# Altium PCB 排针顺序参考.PcbDoc
Units mm, origin at the board's own origin, x right, y up, seen from the top; angles counter-clockwise.
Board outline 152.4 x 101.6 mm, 2 copper layers (Top Layer, Bottom Layer); 12 components, 66 nets, 194 pads, 0 vias.
Unrouted connection lines stored in the file: 117.
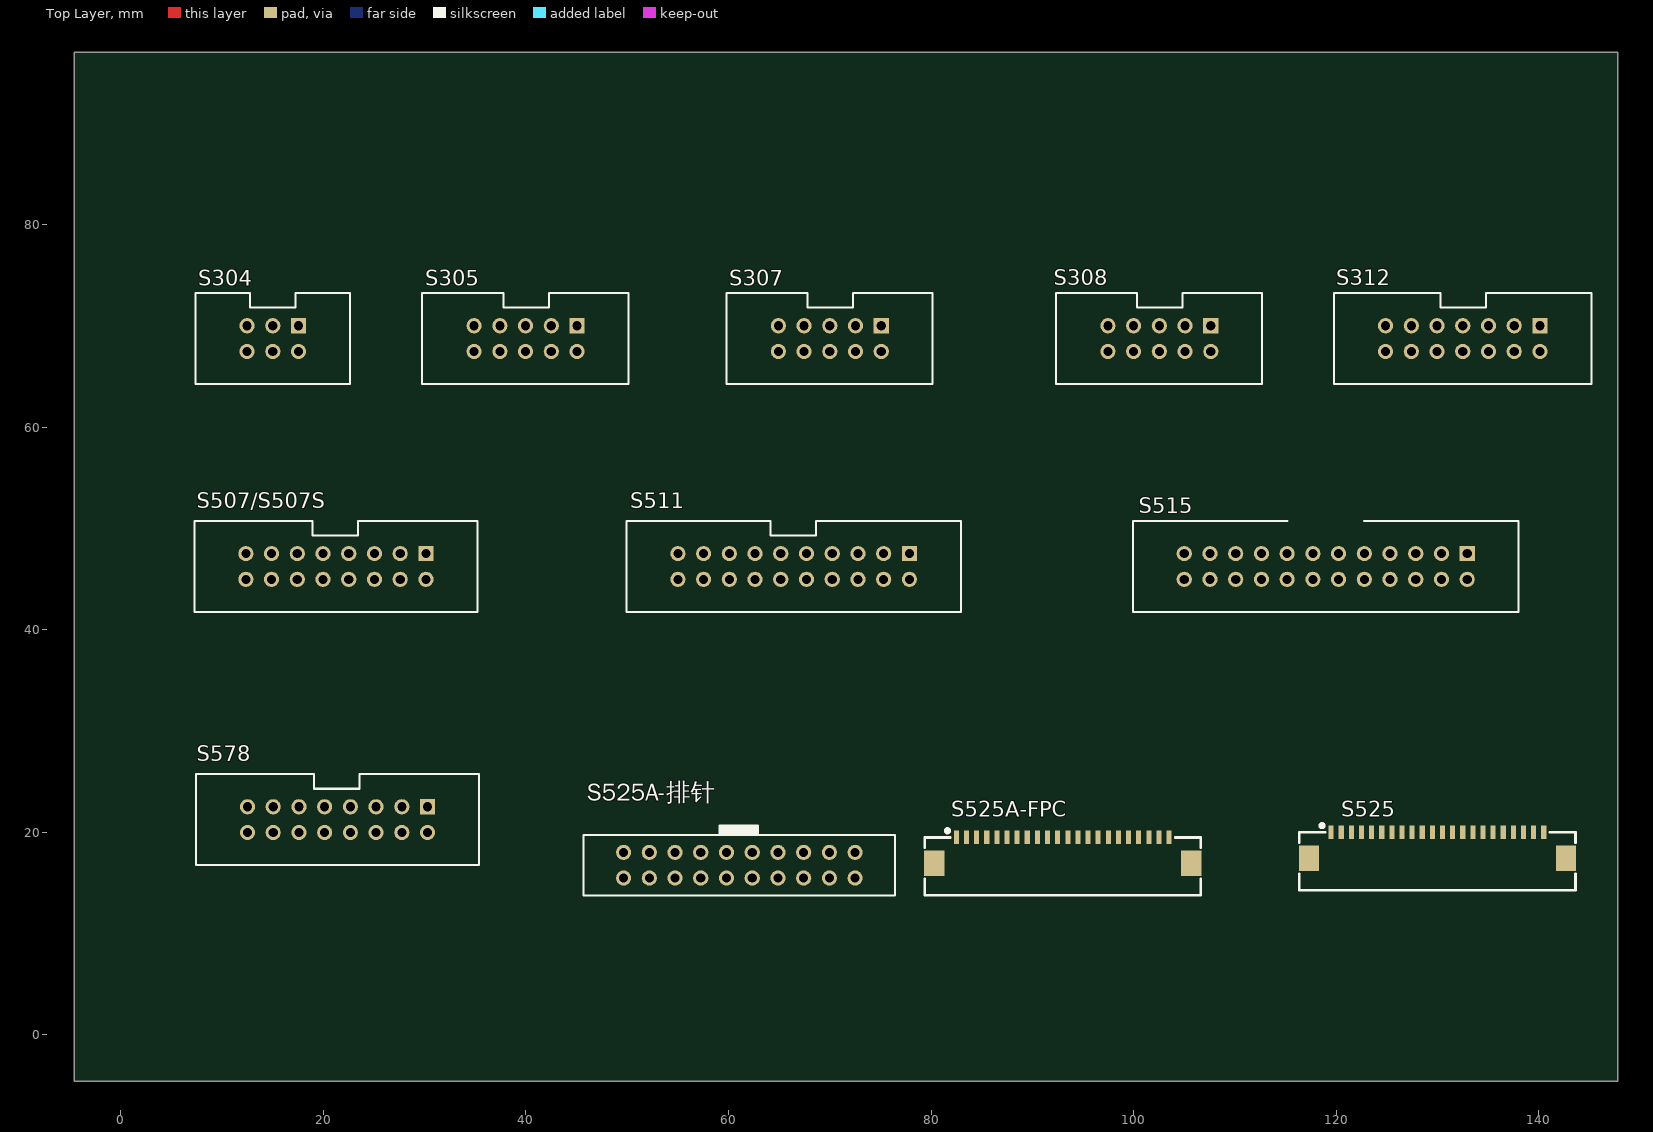
[diagram p0: Top Layer view]
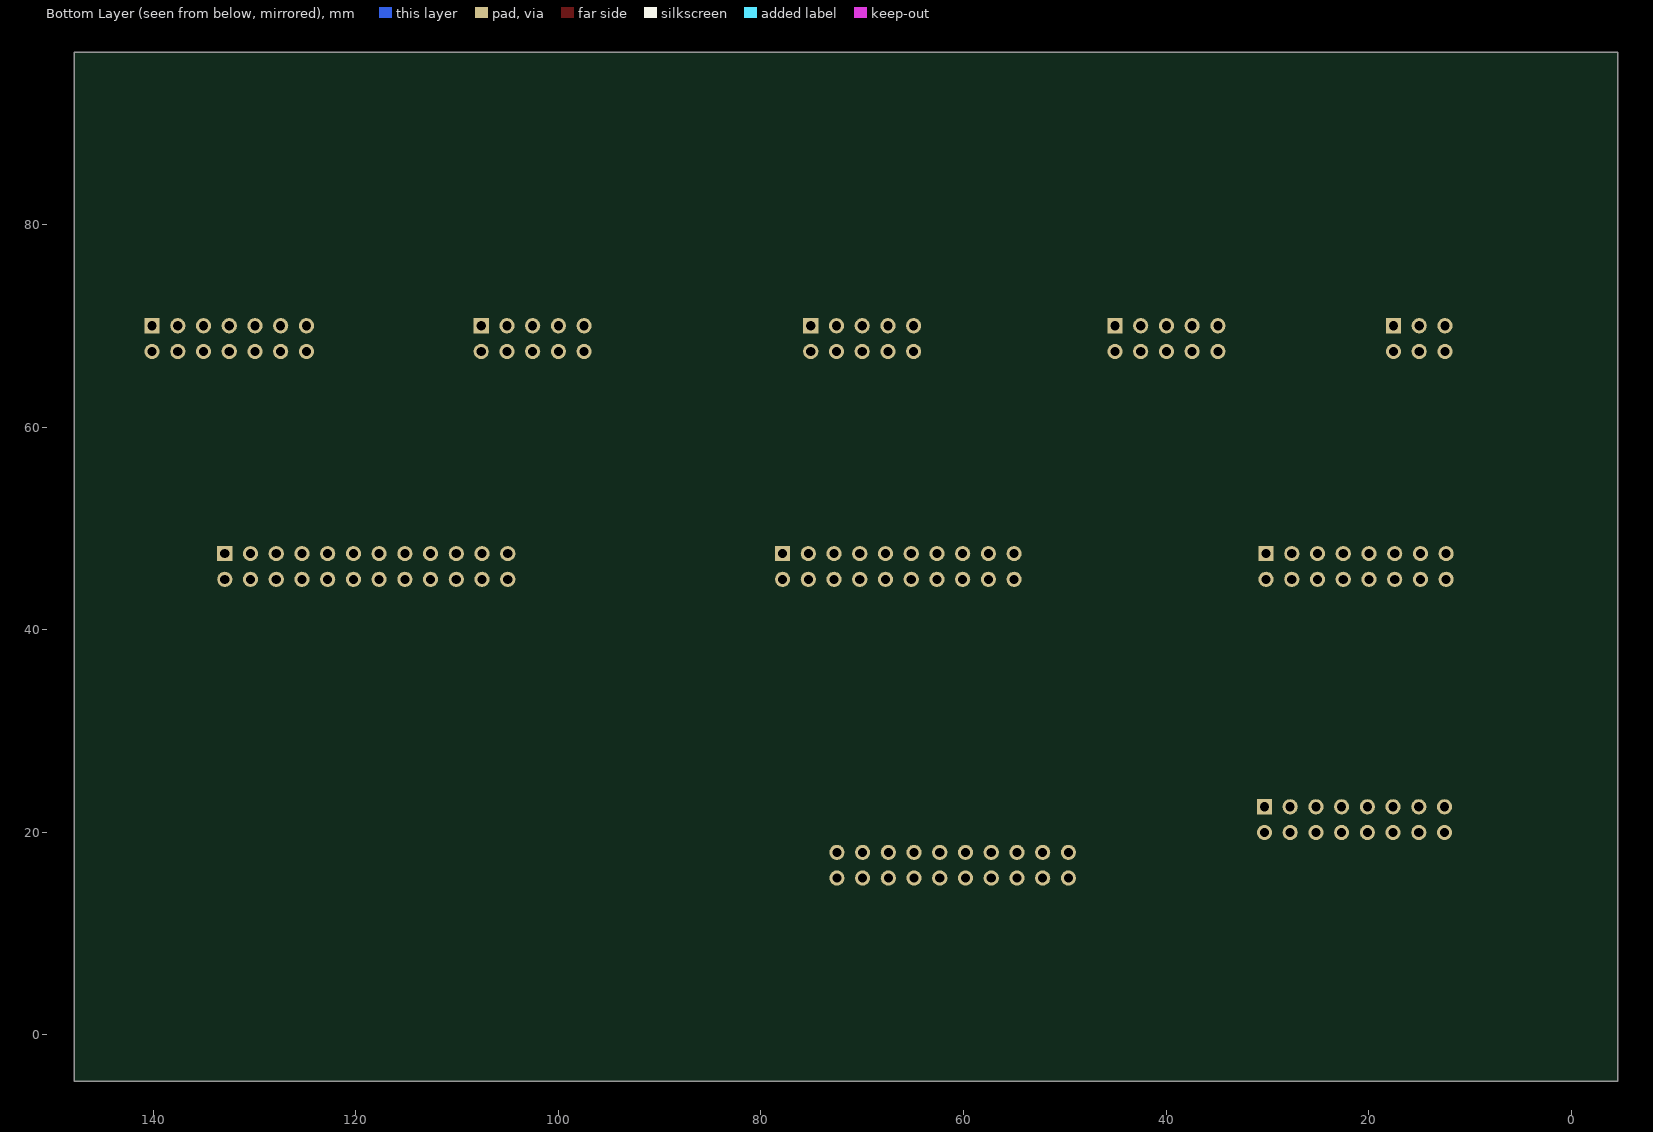
[diagram p1: Bottom Layer view, seen from below]

## Layer stack, top to bottom
Top Solder: solder mask 0.0102, Solder Resist, Dk 3.5
Top Layer: signal copper 0.0356
Dielectric 1: dielectric 0.32, FR-4, Dk 4.8
Bottom Layer: signal copper 0.0356
Bottom Solder: solder mask 0.0102, Solder Resist, Dk 3.5

## Board outline
-4.6,-4.6 147.8,-4.6 147.8,97 -4.6,97

## Design rules (kind name [scope] priority, off if disabled: settings)
Clearance [All] p1: gap=0.254
PolygonConnect [All] p1: connectstyle=Relief reliefconductorwidth=0.254 reliefentries=4 polygonreliefangle="90 Angle" airgapwidth=0.254
RoutingVias [All] p1: holewidth=0.711 width=1.27 viastyle="Through Hole" minholewidth=0.711 minwidth=1.27 maxholewidth=0.711 maxwidth=1.27
SolderMaskExpansion [All] p1: expansion=0.102
Width [All] p1: maxlimit=0.254 minlimit=0.254 preferedwidth=0.254
30 further rules are at their usual default settings.

## Components (designator, comment, footprint, x,y, rotation, side; value= is the part's Value field where it differs from the comment)
S304 "Header 3x2" DC3-6P 17.54,70 r180 top
S305 "Header 5X2" DC3-10P 45.04,70 r180 top
S307 "Header 5X2" DC3-10P 75.08,70 r180 top
S308 "Header 5X2" DC3-10P 107.62,70 r180 top
S312 "Header 7X2" DC3-14P 140.12,70 r180 top
S507/S507S "Header 8X2" DC3-16P 30.12,47.5 r180 top
S511 "Header 10X2" DC3-20P 77.86,47.5 r180 top
S515 "Header 12X2" DC3-24P 132.94,47.5 r180 top
S525 "Header 22" FPC1.0-2H-WS-22P 130,17.425 r0 top
S525A-FPC "Header 22" FPC1.0-2H-WS-22P 93,16.925 r0 top (schematic designator S525A-FPC座)
S525A-排针 "" DC3-MINI-20P 72.5,18 r180 top
S578 "Header 8X2" DC3-16P 30.28,22.5 r180 top

## Footprints (in the part's own frame and the unit in brackets; to place one, negate y for a bottom-side part, rotate by r counter-clockwise, add the part's x,y. Pads: shape width x height; smd on the part's side, far side on the other; paste and mask are expansions set on the pad)
DC3-6P [mm]
  rect 1.5x1.5 hole 0.9: 1(0,0)
  round 1.5 hole 0.9: 2(0,2.54) 3(2.54,0) 4(2.54,2.54) 5(5.08,0) 6(5.08,2.54)
  silkscreen extent -5.08,-3.23 10.16,5.77
DC3-10P [mm]
  rect 1.5x1.5 hole 0.9: 1(0,0)
  round 1.5 hole 0.9: 2(0,2.54) 3(2.54,0) 4(2.54,2.54) 5(5.08,0) 6(5.08,2.54) 7(7.62,0) 8(7.62,2.54) 9(10.16,0) 10(10.16,2.54)
  silkscreen extent -5.08,-3.24 15.3,5.77
DC3-14P [mm]
  rect 1.5x1.5 hole 0.9: 1(0,0)
  round 1.5 hole 0.9: 2(0,2.54) 3(2.54,0) 4(2.54,2.54) 5(5.08,0) 6(5.08,2.54) 7(7.62,0) 8(7.62,2.54) 9(10.16,0) 10(10.16,2.54) 11(12.7,0) 12(12.7,2.54) 13(15.24,0) 14(15.24,2.54)
  silkscreen extent -5.08,-3.24 20.32,5.77
DC3-16P [mm]
  rect 1.5x1.5 hole 0.9: 1(0,0)
  round 1.5 hole 0.9: 2(0,2.54) 3(2.54,0) 4(2.54,2.54) 5(5.08,0) 6(5.08,2.54) 7(7.62,0) 8(7.62,2.54) 9(10.16,0) 10(10.16,2.54) 11(12.7,0) 12(12.7,2.54) 13(15.24,0) 14(15.24,2.54) 15(17.78,0) 16(17.78,2.54)
  silkscreen extent -5.08,-3.23 22.86,5.77
DC3-20P [mm]
  rect 1.5x1.5 hole 0.9: 1(0,0)
  round 1.5 hole 0.9: 2(0,2.54) 3(2.54,0) 4(2.54,2.54) 5(5.08,0) 6(5.08,2.54) 7(7.62,0) 8(7.62,2.54) 9(10.16,0) 10(10.16,2.54) 11(12.7,0) 12(12.7,2.54) 13(15.24,0) 14(15.24,2.54) 15(17.78,0) 16(17.78,2.54) 17(20.32,0) 18(20.32,2.54) 19(22.86,0) 20(22.86,2.54)
  silkscreen extent -5.08,-3.23 27.94,5.77
DC3-24P [mm]
  rect 1.5x1.5 hole 0.9: 1(0,0)
  round 1.5 hole 0.9: 2(0,2.54) 3(2.54,0) 4(2.54,2.54) 5(5.08,0) 6(5.08,2.54) 7(7.62,0) 8(7.62,2.54) 9(10.16,0) 10(10.16,2.54) 11(12.7,0) 12(12.7,2.54) 13(15.24,0) 14(15.24,2.54) 15(17.78,0) 16(17.78,2.54) 17(20.32,0) 18(20.32,2.54) 19(22.86,0) 20(22.86,2.54) 21(25.4,0) 22(25.4,2.54) 23(27.94,0) 24(27.94,2.54)
  silkscreen extent -5.08,-3.23 33.02,5.77
DC3-MINI-20P [mm] "Connector; Header; 3x2 Position"
  round 1.5 hole 0.9: 1(0,0) 2(0,2.54) 3(2.54,0) 4(2.54,2.54) 5(5.08,0) 6(5.08,2.54) 7(7.62,0) 8(7.62,2.54) 9(10.16,0) 10(10.16,2.54) 11(12.7,0) 12(12.7,2.54) 13(15.24,0) 14(15.24,2.54) 15(17.78,0) 16(17.78,2.54) 17(20.32,0) 18(20.32,2.54) 19(22.86,0) 20(22.86,2.54)
  silkscreen extent -3.96,-2.65 26.82,4.27
FPC1.0-2H-WS-22P [mm] "翻盖FP"
  rect 2x2.5 smd: 0(-12.69,0) 0(12.69,0)
  rect 0.5x1.35 smd: 1(-10.5,2.575) 2(-9.5,2.575) 3(-8.5,2.575) 4(-7.5,2.575) 5(-6.5,2.575) 6(-5.5,2.575) 7(-4.5,2.575) 8(-3.5,2.575) 9(-2.5,2.575) 10(-1.5,2.575) 11(-0.5,2.575) 12(0.5,2.575) 13(1.5,2.575) 14(2.5,2.575) 15(3.5,2.575) 16(4.5,2.575) 17(5.5,2.575) 18(6.5,2.575) 19(7.5,2.575) 20(8.5,2.575) 21(9.5,2.575) 22(10.5,2.575)
  silkscreen extent -13.64,-3.17 13.63,3.31, body extent -13.45,-3.15 13.45,2.85, height 2

## Part data
S304: "Header, 3-Pin, Dual row"
S305 S307 S308: "Header, 5-Pin, Dual row"
S312: "Header, 7-Pin, Dual row"
S507/S507S S578: "Header, 8-Pin, Dual row"
S511: "Header, 10-Pin, Dual row"
S515: "Header, 12-Pin, Dual row"
S525 S525A-FPC: "Header, 22-Pin"
S525A-排针: library part "Header 10X2", "Header, 10-Pin, Dual row"

## Nets (pads, with @x,y where several pads share a name; then routed paths per layer and width w, separated by ;. In a path a pad name is that pad's centre, name@x,y a point inside that pad or via, vN(x,y) a via of type N, cw(c..) or ccw(c..) an arc to the next point about the centre after c; other vN are vias at no path point)
A_OUT: S525.16
A_OUT1: S525A-FPC.15 S525A-排针.15
A_OUT2: S525A-FPC.14 S525A-排针.14
A_OUT3: S525A-FPC.13 S525A-排针.13
A_OUT4: S525A-FPC.12 S525A-排针.12
A_OUT5: S525A-FPC.11 S525A-排针.11
A_OUT6: S525A-FPC.10 S525A-排针.10
A_OUT7: S525A-FPC.9 S525A-排针.9
A_OUT8: S525A-FPC.8 S525A-排针.8
A_OUT9: S525A-FPC.7 S525A-排针.7
A_OUT10: S525A-FPC.6 S525A-排针.6
A_OUT11: S525A-FPC.5 S525A-排针.5
A_OUT12: S525A-FPC.4 S525A-排针.4
A_OUT13: S525A-FPC.3 S525A-排针.3
A_OUT14: S525A-FPC.2 S525A-排针.2
A_OUT15: S525A-FPC.1 S525A-排针.1
D_OUT: S507/S507S.8 S511.12 S515.16
GND: S304.5 S305.9 S307.9 S308.9 S312.13 S507/S507S.15 S507/S507S.16 S511.19 S511.20 S515.23 S515.24 S525.21 S525.22 S525A-FPC.21 S525A-FPC.22 S525A-排针.19 S525A-排针.20 S578.15 S578.16
LED_PWM: S525A-FPC.16 S525A-排针.16
OUT1: S304.4 S305.8 S307.8 S308.8 S312.12
OUT2: S304.3 S305.7 S307.7 S308.7 S312.11
OUT3: S304.2 S305.6 S307.6 S308.6 S312.10
OUT4: S304.1 S305.5 S307.5 S308.5 S312.9
OUT5: S305.4 S307.4 S308.4 S312.8
OUT6: S307.3 S308.3 S312.7
OUT7: S307.2 S308.2 S312.6
OUT8: S308.1 S312.5
OUT9: S312.4
OUT10: S312.3
OUT11: S312.2
OUT12: S312.1
OUT_01: S507/S507S.7 S511.11 S515.15 S578.8
OUT_02: S507/S507S.6 S511.10 S515.14 S578.7
OUT_03: S507/S507S.5 S511.9 S515.13 S578.6
OUT_04: S507/S507S.4 S511.8 S515.12 S578.5
OUT_05: S507/S507S.3 S511.7 S515.11 S578.4
OUT_06: S507/S507S.2 S511.6 S515.10 S578.3
OUT_07: S507/S507S.1 S511.5 S515.9 S578.2
OUT_08: S511.4 S515.8 S578.1
OUT_09: S511.3 S515.7
OUT_10: S511.2 S515.6
OUT_11: S511.1 S515.5
OUT_12: S515.4
OUT_13: S515.3
OUT_14: S515.2
OUT_15: S515.1
OUT_A01: S525.15
OUT_A02: S525.14
OUT_A03: S525.13
OUT_A04: S525.12
OUT_A05: S525.11
OUT_A06: S525.10
OUT_A07: S525.9
OUT_A08: S525.8
OUT_A09: S525.7
OUT_A10: S525.6
OUT_A11: S525.5
OUT_A12: S525.4
OUT_A13: S525.3
OUT_A14: S525.2
OUT_A15: S525.1
RX: S507/S507S.10 S511.14 S515.18 S525.18 S578.10
SCL: S507/S507S.12 S511.16 S515.20 S578.12
SDA: S507/S507S.11 S511.15 S515.19 S578.11
TX: S507/S507S.9 S511.13 S515.17 S525.17 S578.9
VCC: S304.6 S305.10 S307.10 S308.10 S312.14 S507/S507S.13 S507/S507S.14 S511.17 S511.18 S515.21 S515.22 S525.19 S525.20 S525A-FPC.19 S525A-FPC.20 S525A-排针.17 S525A-排针.18 S578.14
pads on no net: S305.1 S305.2 S305.3 S307.1 S525.0 S525A-FPC.0 S525A-FPC.17 S525A-FPC.18 S578.13